# Altium PCB PDB REV 21.PcbDoc (part 2 of 2)
Units mil, origin at the board's own origin, x right, y up, seen from the top; angles counter-clockwise.
Board outline 3000 x 3000 mil, 4 copper layers (POWER/SIGNAL, SIG_GND, GND, Signal), stack 23.756 mil thick; 145 components, 115 nets, 452 pads, 119 vias.
Unrouted connection lines stored in the file: 70.
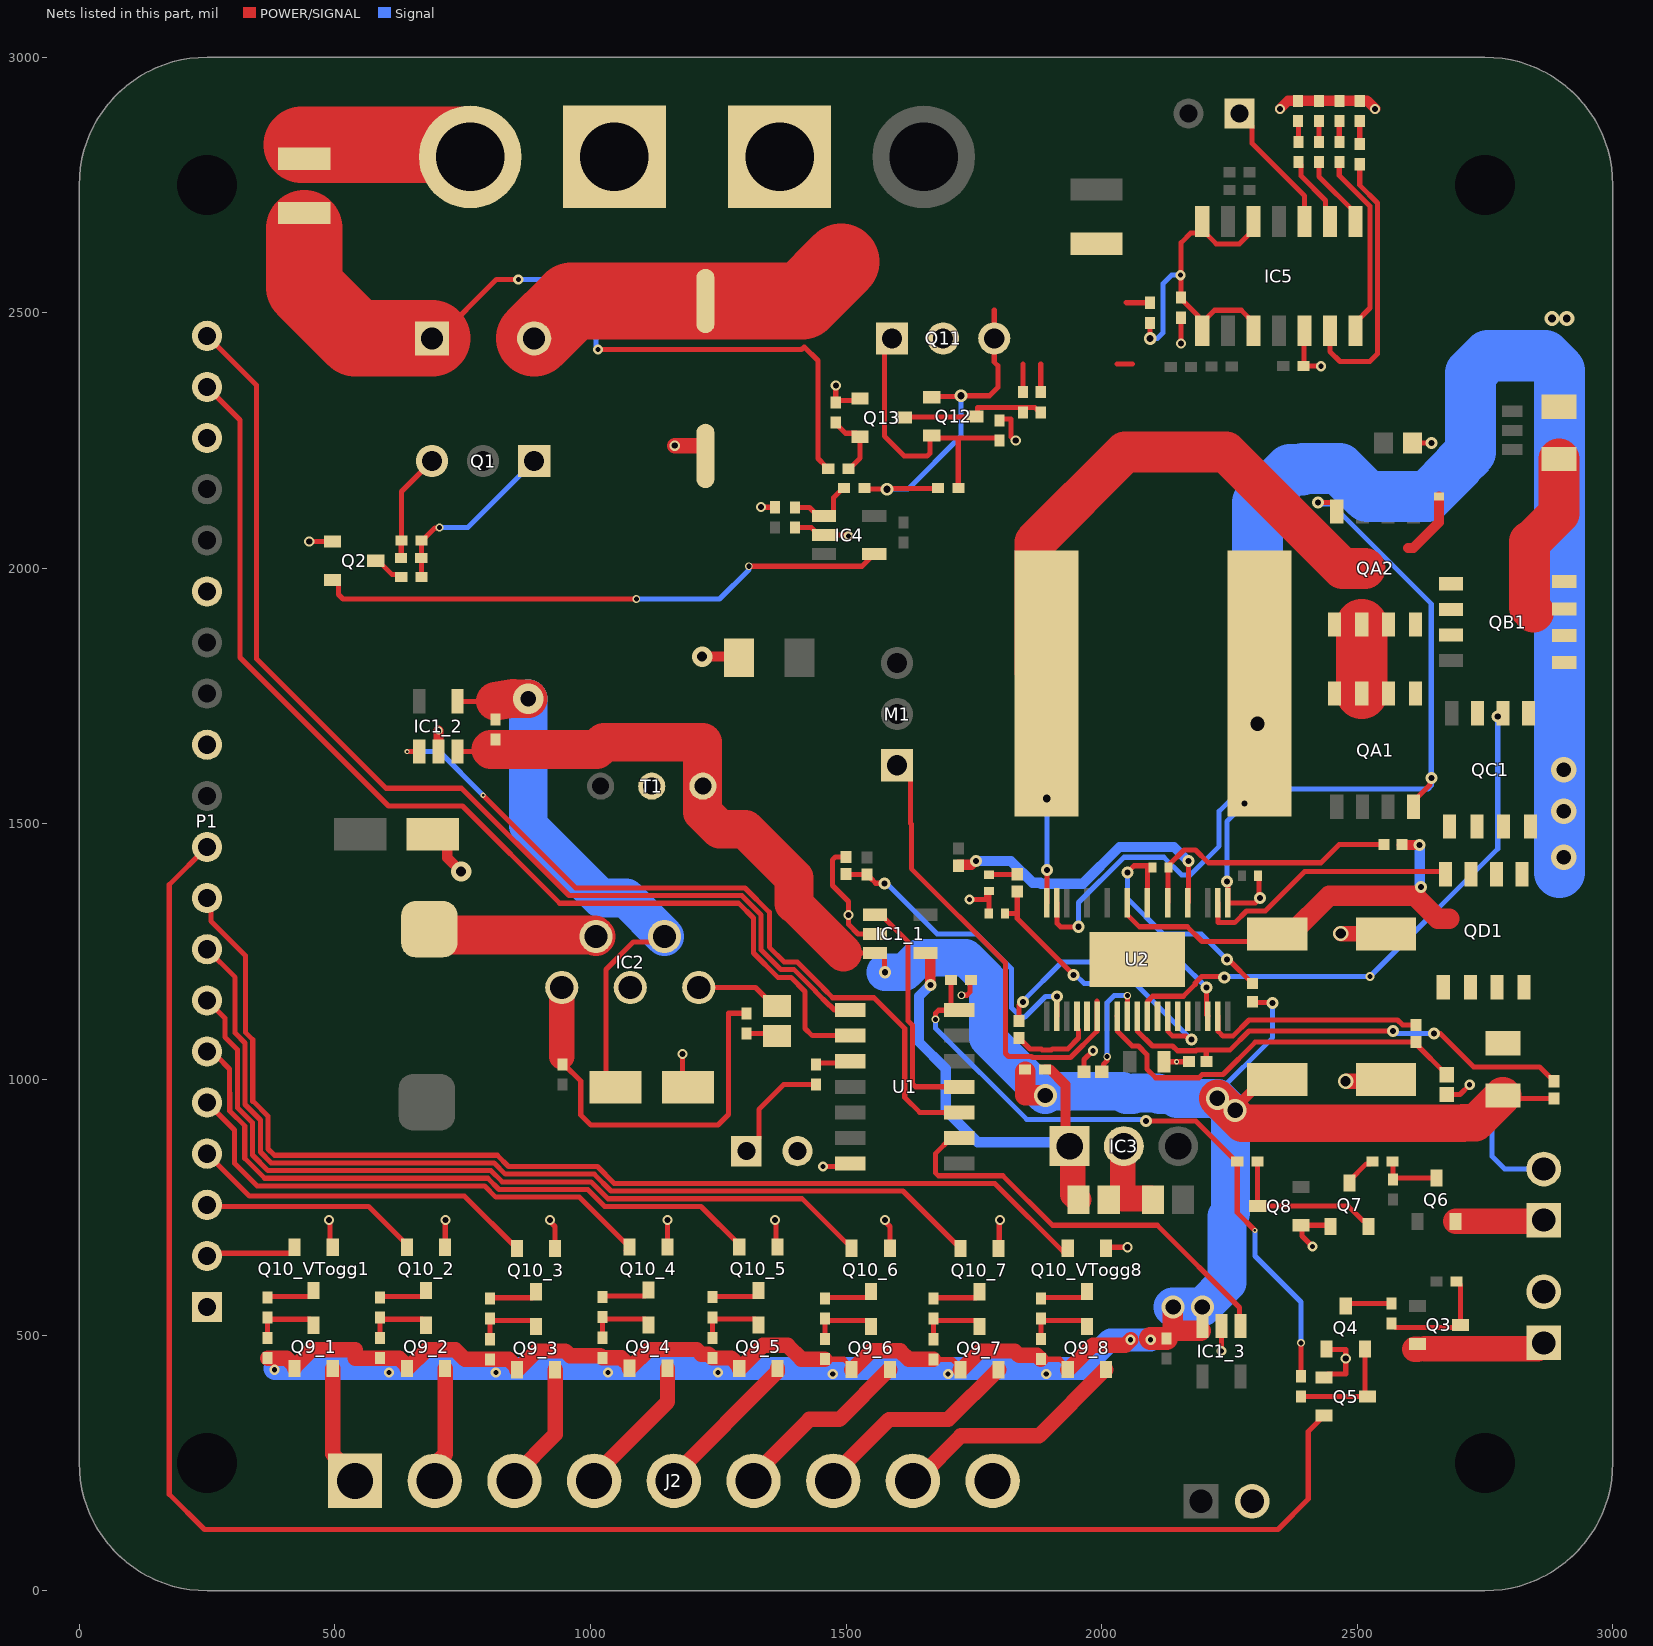
[diagram p4: the nets of this part, all layers, seen from the top]

## Via types
v1: diameter 23.62, hole 11.81, POWER/SIGNAL to Signal, 41 vias
v2: diameter 20, hole 10, POWER/SIGNAL to Signal, 22 vias
v3: diameter 19.68, hole 11.81, POWER/SIGNAL to Signal, 19 vias
v4: diameter 15, hole 10, POWER/SIGNAL to Signal, 9 vias
v5: diameter 10, hole 5, POWER/SIGNAL to Signal, 5 vias
v6: diameter 45, hole 30, POWER/SIGNAL to Signal, 5 vias
v7: diameter 50, hole 28, POWER/SIGNAL to Signal, 4 vias
v8: diameter 25, hole 14, POWER/SIGNAL to Signal, 3 vias
v9: diameter 30, hole 20, POWER/SIGNAL to Signal, 2 vias
v10: diameter 40, hole 20, POWER/SIGNAL to Signal, 2 vias
v11: diameter 30, hole 15, POWER/SIGNAL to Signal, 2 vias
v12: diameter 60, hole 40, POWER/SIGNAL to Signal, 2 vias
v13: diameter 18, hole 10, POWER/SIGNAL to Signal, 1 vias
v14: diameter 25, hole 15, POWER/SIGNAL to Signal, 1 vias
v15: diameter 60, hole 30, POWER/SIGNAL to Signal, 1 vias

## Nets (pads, with @x,y where several pads share a name; then routed paths per layer and width w, separated by ;. In a path a pad name is that pad's centre, name@x,y a point inside that pad or via, vN(x,y) a via of type N, cw(c..) or ccw(c..) an arc to the next point about the centre after c; other vN are vias at no path point) (continued)
GND: C1.2 C3.2 C4.1 C5.1 C6.2 C7.1 C8.1 C9.1 C10.2 C11.2 CDRV1.1 CFF1.1 CSS1.1 CV1.1 IC1_1.2 IC1_2.2 IC1_3.2 IC2.3 IC3.2 IC4.2 IC5.12 J1.2 J2.9 J3.2 J4.2 J5.1@1370,2805 J5.2@1405,860 J6.1 P1.1 P1.12 P1.15 P1.18 Q2.3 Q4.3 Q5.3 Q7.3 Q8.3 Q10_2.3 Q10_3.3 Q10_4.3 Q10_5.3 Q10_6.3 Q10_7.3 Q10_VTogg1.3 Q10_VTogg8.3 Q13.3 R11.2 R13.1 R18.1 R19.1 R21.2 R23.1 R25.2 R26.2 R29.2 R30.2 R32.1 R34.1 R39.1 RA1.1 RFQ1.1 T1.2 U1.14 U2.4 U2.5 U2.12 U2.14 U2.15 U2.39 | length 3097.5
  POWER/SIGNAL w10: v3(450,2052.4) Q2.3@495.35,2052.4 ; v3(488.54,725) 490.4,723.15 490.4,677.56 Q10_VTogg1.3@495.94,672.01 ; Q10_2.3@715.94,672.01 716.04,672.11 716.04,724.9 v3(716.14,725) ; v3(921.14,725) 921.14,722.38 930.94,712.58 Q10_3.3@930.94,669.65 ; Q10_4.3@1150.94,672.68 1151.04,672.78 1151.04,724.9 v3(1151.14,725) ; v3(1180,1050) 1180,995.87 C1.2@1190.87,985 ; v3(1334.09,2120) 1334.41,2119.68 R18.1@1361.14,2119.68 ; v3(1361.14,725) 1362.99,723.15 1362.99,675.27 Q10_5.3@1365.94,672.32 ; R19.1@1400,2079.72 1432.31,2079.72 1438.16,2073.87 1438.16,2072.13 1444.97,2065.31 IC4.2@1456.79,2065.31 1502.87,2065.31 v2(1504.68,2063.5) ; v2(1455,830) 1502.33,830 U1.14@1508.23,835.9 ; v3(1480,2357.75) R23.1@1480,2324.68 1483.86,2328.54 1523.82,2328.54 Q13.3@1527.68,2332.4 ; R11.2@1500,1435.73 1479.39,1435.73 1473.53,1429.87 1473.53,1379.62 1504.68,1348.47 v3(1504.68,1322.12) 1504.68,1303.84 1523.52,1285 IC1_1.2@1556.83,1285 ; v3(1576.14,725) 1576.14,722.38 1585.94,712.58 Q10_6.3@1585.94,670 ; v4(1726,1165) 1736.27,1165 1742.91,1171.65 1742.91,1195 R13.1@1744.88,1195 ; v2(1741.69,1352.52) 1775.16,1352.52 1775.16,1366.38 1778.03,1369.25 C10.2@1780,1369.25 1780,1325.75 C11.2@1779.25,1325 ; Q10_7.3@1798.54,669.65 1799.84,670.94 1799.84,723.7 v3(1801.14,725) ; 1810,2292.29 1822.6,2292.29 1822.6,2257.4 1829.64,2250.36 v3(1832.07,2250.36) ; RFQ1.1@1838.6,1081.45 1838.6,1080.47 1844.43,1074.64 1845.41,1074.64 1860.05,1060 1881.99,1060 1883.8,1058.19 1901.87,1058.19 1903.68,1060 1933.74,1060 1955,1081.26 1955,1097.39 1951.89,1100.5 U2.4@1951.89,1124 ; CSS1.1@1965.79,1015 1965.79,1039.06 v2(1983.11,1056.38) ; Q10_VTogg8.3@2008.54,670 2010.55,672.01 v3(2050.32,672.01) ; CDRV1.1@2122.03,1035 RA1.1@2171.38,1035 ; v3(2155.47,2440) R32.1@2155.47,2490.32 ; v2(2234.49,469.06) IC1_3.2@2234.49,517.64 ; IC5.12@2397,2465 2395.84,2463.84 2395.84,2397.5 R34.1@2394.68,2396.34 2428.26,2396.34 v2(2429.09,2395.51) ; v2(2412.43,673.61) 2391.99,694.05 2391.99,713.05 Q8.3@2390.04,715 2445.32,715 Q7.3@2447.64,712.68 ; Q5.3@2435.32,417.4 2442.13,424.21 2477.31,424.21 2477.64,424.54 v3(2477.64,454.21) 2477.64,471.78 2441.06,471.78 Q4.3@2440.24,472.6 ; v9(2477.31,996.73) v9@2480.02,996.73 ; C8.1@2608.54,2245 v1(2645,2245) ; CV1.1@2675,971.02 2701.02,971.02 v2(2720,990)
  POWER/SIGNAL w20: C6.2@691.73,1480 720,1451.73 720,1434.12 v10(747,1407.12) ; IC1_2.2@702.6,1641.57 702.6,1682.6 v4(703,1683) ; C3.2@1217.87,2240 1225,2232.87 C3.2@1225,2220 ; v10(1218.47,1827.61) 1288.34,1827.61 C9.1@1290.94,1825 ; v3(2349,2899) 2364.69,2914.69 R29.2@2384,2914.69 R25.2@2425,2914.69 R30.2@2505,2914.69 2519.45,2914.69 v3(2535.14,2899)
  POWER/SIGNAL w30: v3(1165,2240) C3.2@1217.87,2240 ; v9(2467.66,1285.91) 2468.58,1285 C7.1@2556.5,1285 ; v9@2480.02,996.73 2553.23,996.73 CFF1.1@2556.5,1000
  POWER/SIGNAL w50: IC3.2@2041.3,877.5 2041.3,767.4 C5.1@2097.13,767.4
  Signal w10: 2765,945 2763.54,943.54 2763.54,850 2788.54,825 J4.2@2865.04,825
  other v5: 2146.7,1035
  other v11: 2881,2489 2910.16,2489
GPOS: F2.1 J6.2 | length 339.7
  POWER/SIGNAL w150: 435,2828.5 741.5,2828.5 J6.2@765,2805
IN+_U_CurrentSensor1: CFF1.2 IC1_1.3 IC1_2.3 IC1_3.3 Q9_1.3 Q9_2.3 Q9_3.3 Q9_4.3 Q9_5.3 Q9_6.3 Q9_7.3 Q9_8.3 R9_1.2 R9_2.2 R9_3.2 R10_1.2 R10_2.2 R10_3.2 R10_4.2 R10_5.2 R10_6.2 R10_7.2 R10_8.2 RB1.2 RF1.2 RS1.2 T1.1 | length 7653
  POWER/SIGNAL w10: IC1_2.3@740,1641.57 801.6,1641.57 ; R10_6.2@1458.54,452.99 1495.75,452.99 1511.14,437.6 Q9_6.3@1511.14,432.68 ; 1495.16,1247.6 IC1_1.3@1556.83,1247.6 1568.64,1247.6 1575.45,1240.79 1575.45,1210 v1(1576.14,1210) ; R10_7.2@1671.14,452.64 1708.35,452.64 1723.74,437.24 Q9_7.3@1723.74,432.32 ; R10_8.2@1881.14,452.99 1918.35,452.99 1933.74,437.6 Q9_8.3@1933.74,432.68 ; R9_3.2@2126.5,493.58 2139.04,506.13 2147.32,514.41 2188.5,514.41 2191.18,511.73 IC1_3.3@2193.9,509.02 ; v6(2197,555) v6(2197,555) 2197.04,517.68 IC1_3.3@2197.09,517.64 IC1_3.3@2197.09,512.2 ; RF1.2@2295.63,1152.28 2296.77,1151.14 2333.54,1151.14 v1(2334.68,1150) ; RS1.2@2785,968.82 2790.55,963.27 RB1.2@2885,963.27
  POWER/SIGNAL w20: 801.6,1641.57 805.52,1645.5 ; v6(2261.39,940) 2261.39,944.89 2316.5,1000 CFF1.2@2343.5,1000
  POWER/SIGNAL w30: R10_1.2@368.54,455 405.75,455 421.14,439.61 Q9_1.3@421.14,438.23 ; Q9_1.3@421.14,434.69 Q9_1.3@421.14,438.23 ; R10_6.2@1458.54,452.99 1412.78,452.99 1385.77,480 1337.6,480 1292.6,435 Q9_5.3@1291.14,435 1291.14,439.92 1275.75,455.31 R10_5.2@1238.54,455.31 1230.98,462.87 1217.13,462.87 1207.91,472.09 1114.33,472.09 1077.6,435.35 Q9_4.3@1076.14,435.35 1076.14,440.28 1060.75,455.67 R10_4.2@1023.54,455.67 1019.21,460 960.1,460 951.04,469.06 894.33,469.06 857.6,432.32 Q9_3.3@856.14,432.32 856.14,437.24 840.75,452.64 R10_3.2@803.54,452.64 754.82,452.64 736.04,471.42 679.33,471.42 642.6,434.69 Q9_2.3@641.14,434.69 641.14,439.61 625.75,455 R10_2.2@588.54,455 540,455 540,471.42 454.33,471.42 Q9_1.3@421.14,438.23 ; Q9_6.3@1511.14,432.68 1512.6,432.68 1549.33,469.41 1606.04,469.41 1622.81,452.64 R10_7.2@1671.14,452.64 ; Q9_7.3@1723.74,432.32 1725.2,432.32 1761.93,469.06 1830.1,469.06 1838.6,460.55 1873.58,460.55 R10_8.2@1881.14,452.99 ; Q9_8.3@1933.74,432.68 1935.2,432.68 1983.11,480.59 2046.34,480.59 v2(2056.75,491) ; IC1_3.3@2193.9,509.02 IC1_3.3@2197.09,512.2
  POWER/SIGNAL w40: R9_1.2@1850.31,1015 1850.31,969.7 1889.04,969.7 v6(1890,968.74) ; v6(2140,555) 2139.04,554.04 2139.04,506.13 2139.04,505.54 2142.52,509.02 IC1_3.3@2193.9,509.02
  POWER/SIGNAL w45: v2@2096,493.58 R9_3.2@2126.5,493.58
  POWER/SIGNAL w73: 1398,1344.76 1495.16,1247.6 ; v6(2226.59,963.27) 2275.29,914.56 2706.36,914.56 2707.26,915.46 2731.64,915.46 RS1.2@2785,968.82
  POWER/SIGNAL w76: 805.52,1645.5 1012.13,1645.5 1026.63,1660 1219.15,1660 1219.15,1523.62 1252.95,1489.81 1302.7,1489.81 1398,1394.51 1398,1344.76
  Signal w10: v6(2226.59,963.27) 2226.59,963.51 2221.35,968.74 2334.68,1082.07 v1(2334.68,1150)
  Signal w45: v2@383,435 815,435 1473.98,435 1960.94,435 2016.94,491 v2(2056.75,491) v2(2096,491)
  Signal w73: v1(1576.14,1210) 1614.61,1210 1642.92,1238.31 1733.93,1238.31 1777.34,1194.89 1777.34,1143.73 1776.69,1143.08 1776.69,1082.05 v6(1890,968.74)
  Signal w76: v6@1888.46,978.74 1890.04,977.16 2041.24,977.16 2048.16,970.24 2060.64,970.24 2064.18,973.79 2109.59,973.79 2113.14,970.24 2140.27,970.24 2147.24,963.27 v6(2226.59,963.27) 2251.92,937.94 2251.92,739.04 2245.34,732.46 2245.34,603.35 v6(2197,555) v6(2140,555)
  other v2: 1473.98,424.21 1699.86,424.21 1891.66,424.21 606,427 815,427 1034.31,427 1249.36,427 381.93,432.32
IN-_U_CurrentSensor1: C4.2 IC1_1.4 IC3.1 R9_1.1 | length 909.4
  POWER/SIGNAL w20: IC1_1.4@1655.25,1247.6 1663.19,1247.6 1665,1245.79 v1(1665,1185) ; R9_1.1@1889.68,1020 1899.13,1020 1929.13,990 1929.13,878.27 IC3.1@1937.4,870
  POWER/SIGNAL w50: IC3.1@1935,877.5 1943.96,868.54 1943.96,775.25 1954.21,765 C4.2@1955,765
  Signal w20: v1(1665,1185) 1642.92,1162.92 1642.92,1073.54 1695.16,1021.3 1695.16,939.84 1757.5,877.5 IC3.1@1935,877.5
IN-_U_CurrentSensor2: C1.1 IC1_2.4 IC2.4 R9_2.1 | length 1244.9
  POWER/SIGNAL w10: IC1_2.4@740,1740 780.83,1740 814.17,1706.65 814.17,1730 ; 814.17,1740 814.17,1730 ; v15@872.6,1739.26 v15(878.34,1745) 834.7,1730 814.17,1730 ; C1.1@1049.13,985 1030.51,1003.62 1030.51,1215.51 1084.48,1269.48 1134.48,1269.48 IC2.4@1145,1280
  POWER/SIGNAL w76: 814.17,1740 849.43,1745.72 v15(878.34,1745)
  Signal w76: v15(878.34,1745) 878.34,1496.66 1019.52,1355.48 1069.52,1355.48 IC2.4@1145,1280
"Main Chute": P1.10 Q5.2 | length 3754.2
  POWER/SIGNAL w10: P1.10@250,1455 176.1,1381.1 176.1,188.9 245,120 2345,120 2404.37,179.37 2404.37,311.65 Q5.2@2435.32,342.6
NDRV: M1.1 U2.6 | length 914.6
  POWER/SIGNAL w10: M1.1@1600,1615 1626.5,1588.5 1626.5,1501.23 1627.85,1499.87 1627.85,1412.6 1811.81,1228.64 1811.81,1050.86 1817.67,1045 1862.74,1045 1864.55,1043.19 1939.41,1043.19 1990.76,1094.54 1990.76,1123.5 U2.6@1991.26,1124 1990.76,1124.5 1990.76,1153.46
NetC2_1: C2.1 R14.2 | length 62.2
  POWER/SIGNAL w10: R14.2@1305,1090.31 1359.69,1090.31 C2.1@1365,1085
NetC2_2: C2.2 IC2.5 | length 167.9
  POWER/SIGNAL w10: IC2.5@1212.01,1180 1323.15,1180 1359.09,1144.06 C2.2@1365,1144.06
NetC3_1: C3.1 D1.2 D4.3 Q1.3 Q11.2 R1.2 | length 878
  POWER/SIGNAL w10: R1.2@629.68,2020 630,2020.31 630,2054.68 D1.2@630.31,2055 630.31,2150.31 Q1.3@690,2210
  POWER/SIGNAL w150: D4.3@890,2450 963.15,2523.15 C3.1@1225,2523.15 1414.07,2523.15 1490.93,2600
NetC10_1: C10.1 R40.2 | length 55.4
  POWER/SIGNAL w10: C10.1@1780,1400.75 1780.49,1401.24 1834.51,1401.24 R40.2@1835,1401.73
NetC11_1: C11.1 R40.1 U2.13 | length 598.7
  POWER/SIGNAL w10: C11.1@1810.75,1325 1835,1325 ; R40.1@1835,1368.27 1835,1325 ; v1(1945,1205) 1835,1315 1835,1325 ; U2.13@2129.06,1124 2129.56,1123.5 2129.56,1094.54 2139.1,1085 2165.08,1085 2171.89,1078.19 v1(2175.58,1078.19)
  Signal w10: v1(1945,1205) 1948.69,1205 1965.43,1188.25 2065.52,1188.25 v1(2175.58,1078.19)
NetCF1_1: CF1.1 RF1.1 U2.28 | length 501.1
  POWER/SIGNAL w10: v1(2050.31,1405) 2063.58,1418.27 2099.25,1418.27 CF1.1@2099.25,1415 2089.68,1415 U2.28@2089.68,1346 ; v1(2245,1235) 2248.35,1235 RF1.1@2295.63,1187.72
  Signal w10: v1(2050.31,1405) 2050.31,1354.69 2120,1285 2195,1285 v1(2245,1235)
NetCF1_2: CF1.2 RF2.1 U2.26 | length 530.2
  POWER/SIGNAL w10: U2.26@2129.06,1346 2129.56,1346.5 2129.56,1411.66 CF1.2@2131.85,1413.96 ; CF1.2@2129.56,1417.91 2160.97,1449.33 2183.67,1449.33 2208.84,1424.16 2429.09,1424.16 2464.93,1460 RF2.1@2552.32,1460
NetCSS1_2: CSS1.2 U2.9 | length 225.7
  POWER/SIGNAL w10: CSS1.2@2000.43,1015 2001.22,1015 2003.43,1017.2 2003.43,1029.38 2010.76,1036.72 2010.76,1044.81 v4(2010.94,1045) ; U2.9@2050.32,1124 v4(2050.32,1164.19)
  Signal w10: v4(2010.94,1045) 2010.94,1150.82 2024.32,1164.19 v4(2050.32,1164.19)
NetD1_1: D1.1 Q1.1 R1.1 R2.2 | length 356.1
  POWER/SIGNAL w10: R2.2@669.37,1983.5 669.53,1983.66 669.53,2054.84 D1.1@669.68,2055 671.65,2055 695.7,2079.04 703.69,2079.04 v4(704.65,2080)
  Signal w10: v4(704.65,2080) 760,2080 Q1.1@890,2210
NetD2_1: D2.1 Q11.1 Q12.2 R21.1 | length 576.1
  POWER/SIGNAL w10: Q11.1@1590,2450 1575,2435 1575,2258.82 1613.82,2220 1625,2220 1625.47,2219.53 1658.55,2219.53 1664.41,2225.39 1664.41,2256.83 Q12.2@1667.68,2260.1 1672.57,2255.21 1720,2255.21 ; D2.1@1719.68,2157.2 1719.68,2254.89 1720,2255.21 ; R21.1@1800,2250.36 1795.16,2255.21 1720,2255.21
NetD3_1: D3.1 Q12.1 Q13.1 R20.1 | length 283.6
  POWER/SIGNAL w10: Q13.1@1612.32,2295 1613.57,2296.25 1751.07,2296.25 Q12.1@1752.32,2297.5 1757.24,2297.5 1757.24,2315 1869.25,2315 R20.1@1875.02,2309.23
NetD5_1: D5.1 IC5.1 | length 146.3
  POWER/SIGNAL w10: D5.1@2425,2795 2425,2766.78 2497,2694.78 IC5.1@2497,2678.54
NetD5_2: D5.2 R25.1 | length 40.9
  POWER/SIGNAL w10: D5.2@2425,2834.37 R25.1@2425,2875.32
NetD6_1: D6.1 IC5.14 | length 366.5
  POWER/SIGNAL w10: D6.1@2465,2795 2465,2768.48 2525,2708.48 2525,2509.24 2497,2481.24 IC5.14@2497,2465
NetD6_2: D6.2 R26.1 | length 40.6
  POWER/SIGNAL w10: D6.2@2465,2834.37 R26.1@2465,2875
NetD7_1: D7.1 IC5.2 | length 142.1
  POWER/SIGNAL w10: D7.1@2385,2795 2389.84,2790.16 2389.84,2768.19 2438.22,2719.81 2438.22,2687.32 IC5.2@2447,2678.54
NetD7_2: D7.2 R29.1 | length 40.3
  POWER/SIGNAL w10: D7.2@2385,2834.37 R29.1@2385,2874.69
NetD8_1: D8.1 IC5.13 | length 533.5
  POWER/SIGNAL w10: IC5.13@2447,2465 2447,2424 2466.36,2404.64 2524.64,2404.64 2540,2420 2540,2714.7 2505,2749.7 D8.1@2505,2790.63
NetD8_2: D8.2 R30.1 | length 45.3
  POWER/SIGNAL w10: D8.2@2505,2830 R30.1@2505,2875.32
NetIC1_U_CurrentSensor1_1: IC1_1.1 U1.4 | length 462.1
  POWER/SIGNAL w10: IC1_1.1@1556.83,1322.4 1568.64,1322.4 1583.02,1308.02 1583.38,1308.02 1621.63,1269.77 1621.63,1114.58 1630,1106.21 1630,992.01 1636.11,985.9 U1.4@1721.77,985.9
NetIC1_U_CurrentSensor2_1: IC1_2.1 U1.3 | length 1515.8
  POWER/SIGNAL w10: v5(641.57,1641.57) IC1_2.1@665.2,1641.57 ; v5(790,1556.22) 971.22,1375 1302.43,1375 1350,1327.43 1350,1259.02 1379.02,1230 1404.83,1230 1455,1179.83 1455,1178.98 1473.98,1160 1555,1160 1615,1100 1615,965 1644.1,935.9 U1.3@1721.77,935.9
  Signal w10: v5(641.57,1641.57) 704.65,1641.57 v5(790,1556.22)
NetIC1_U_CurrentSensor3_1: IC1_3.1 U1.2 | length 838.8
  POWER/SIGNAL w10: U1.2@1721.77,885.9 1705.53,885.9 1674.76,855.13 1674.76,817.76 1680.62,811.9 1806.84,811.9 1903.74,715 2109.04,715 2270,554.04 2270,519.53 IC1_3.1@2271.89,517.64
NetIC2_1: IC2.1 R14.1 R15.1 | length 789.4
  POWER/SIGNAL w10: R15.1@945,1029.68 948.5,1029.68 981.11,997.07 981.11,930.86 1000.86,911.11 1249.36,911.11 1270,931.76 1270,1129.68 R14.1@1305,1129.68
  POWER/SIGNAL w50: 943.98,1045 IC2.1@943.98,1180
NetIC2_2: IC2.2 L1.2 | length 331.9
  POWER/SIGNAL w76: L1.2@685,1294.29 696.43,1282.86 1008.12,1282.86 IC2.2@1010.98,1280
NetIC4_1: IC4.1 R16.1 R19.2 | length 142.5
  POWER/SIGNAL w10: R19.2@1400,2119.09 1428.6,2119.09 1444.97,2102.72 IC4.1@1456.79,2102.72 1468.6,2102.72 1475.41,2109.53 1475.41,2138.17 1494.44,2157.2 R16.1@1496.41,2157.2
NetIC4_4: IC4.4 Q2.2 | length 1128.6
  POWER/SIGNAL w10: Q2.2@495.35,1977.6 500.28,1977.6 507.09,1970.79 507.09,1948.77 515.86,1940 v4(1090,1940) ; v4(1310,2004.13) 1531.42,2004.13 IC4.4@1555.21,2027.91
  Signal w10: v4(1090,1940) 1252.5,1940 1310,1997.5 v4(1310,2004.13)
NetIC5_3: IC5.3 P2.1 | length 264.1
  POWER/SIGNAL w10: P2.1@2270,2890 2294.53,2865.47 2294.53,2831.36 2397,2728.89 IC5.3@2397,2678.54
NetJ3_1: J3.1 Q3.2 | length 242.8
  POWER/SIGNAL w50: Q3.2@2612.72,472.6 Q3.2@2618.31,472.6 ; Q3.2@2632.72,473.19 2853.23,473.19 J3.1@2865.04,485
NetJ4_1: J4.1 Q6.2 | length 173.6
  POWER/SIGNAL w50: Q6.2@2692.44,722.68 2862.72,722.68 J4.1@2865.04,725
NetJ5_1: J5.1@1305,860 R12.2@1441.5,990.31 | length 223.9
  POWER/SIGNAL w10: J5.1@1305,860 1329.53,884.53 1329.53,941.56 1378.29,990.31 R12.2@1441.5,990.31
NetP1_19: P1.19 U1.9 | length 2138.8
  POWER/SIGNAL w10: P1.19@250,2355 314.53,2290.47 314.53,1825.47 605,1535 750,1535 940,1345 1290,1345 1319.09,1315.91 1319.09,1247.5 1366.6,1200 1392.4,1200 1420,1172.4 1420,1100 1434.1,1085.9 U1.9@1508.23,1085.9
NetP1_20: P1.20 U1.8 | length 2184
  POWER/SIGNAL w10: P1.20@250,2455 346.64,2358.36 346.64,1823.36 600,1570 747.94,1570 957.94,1360 1296.21,1360 1334.09,1322.12 1334.09,1253.71 1372.81,1215 1398.61,1215 1440,1173.61 1440,1172.76 1467.76,1145 1468.61,1145 1477.72,1135.9 U1.8@1508.23,1135.9 1521.22,1135.9 U1.8@1530,1144.68
NetQ2_1: Q2.1 R2.1 | length 63
  POWER/SIGNAL w10: Q2.1@580,2015 584.92,2015 611.57,1988.35 625.16,1988.35 R2.1@630,1983.5
NetQ3_1: Q3.1 R3.1 R4.2 | length 218.8
  POWER/SIGNAL w10: R4.2@2575.04,515 2697.36,515 Q3.1@2702.36,520 2702.36,597.05 2701.22,598.19 2701.22,600.16 2696.38,605 R3.1@2694.41,605
NetQ4_1: Q4.1 R4.1 | length 91.8
  POWER/SIGNAL w10: Q4.1@2477.64,557.24 2482.26,561.87 R4.1@2567.54,561.87
NetQ4_2: Q4.2 Q5.1 R5.1 | length 217.5
  POWER/SIGNAL w10: R5.1@2390.2,380.16 2519.8,380.16 Q5.1@2519.96,380 ; Q5.1@2515.04,384.92 Q4.2@2515.04,472.6
NetQ6_1: Q6.1 R6.1 R7.2 | length 121.6
  POWER/SIGNAL w10: R7.2@2569.41,840 2569.72,839.69 2569.72,805 R6.1@2570.04,804.68 ; R6.1@2570.04,809.69 2572.4,807.32 Q6.1@2655.04,807.32
NetQ7_1: Q7.1 R7.1 | length 65.6
  POWER/SIGNAL w10: Q7.1@2485.04,797.32 2485.04,802.24 2517.95,835.16 2525.2,835.16 R7.1@2530.04,840
NetQ7_2: Q7.2 Q8.1 R8.1 | length 324.3
  POWER/SIGNAL w10: R8.1@2304.68,840 2304.68,753.11 Q8.1@2305.39,752.4 2482.72,752.4 2510.71,724.41 2515.63,724.41 2522.44,717.6 Q7.2@2522.44,712.68
NetQ9_VTogg1_1: Q9_1.1 R10_1.1 R11_1.2 | length 134.4
  POWER/SIGNAL w10: R10_1.1@368.54,494.37 R11_1.2@368.54,534.69 ; R11_1.2@372.17,531.06 451.73,531.06 458.54,524.25 Q9_1.1@458.54,519.33
NetQ9_VTogg2_1: Q9_2.1 R10_2.1 R11_2.2 | length 134.4
  POWER/SIGNAL w10: R10_2.1@588.54,494.37 R11_2.2@588.54,534.69 ; R11_2.2@592.17,531.06 671.73,531.06 678.54,524.25 Q9_2.1@678.54,519.33
NetQ9_VTogg3_1: Q9_3.1 R10_3.1 R11_3.2 | length 134.4
  POWER/SIGNAL w10: R10_3.1@803.54,492.01 R11_3.2@803.54,532.32 ; R11_3.2@807.17,528.7 886.73,528.7 893.54,521.89 Q9_3.1@893.54,516.97
NetQ9_VTogg4_1: Q9_4.1 R10_4.1 R11_4.2 | length 134.4
  POWER/SIGNAL w10: R10_4.1@1023.54,495.04 R11_4.2@1023.54,535.35 ; R11_4.2@1027.17,531.73 1106.73,531.73 1113.54,524.92 Q9_4.1@1113.54,520
NetQ9_VTogg5_1: Q9_5.1 R10_5.1 R11_5.2 | length 134.4
  POWER/SIGNAL w10: R10_5.1@1238.54,494.68 R11_5.2@1238.54,535 ; R11_5.2@1242.17,531.38 1321.73,531.38 1328.54,524.57 Q9_5.1@1328.54,519.65
NetQ9_VTogg6_1: Q9_6.1 R10_6.1 R11_6.2 | length 134.4
  POWER/SIGNAL w10: R10_6.1@1458.54,492.36 R11_6.2@1458.54,532.68 ; R11_6.2@1462.17,529.06 1541.73,529.06 1548.54,522.24 Q9_6.1@1548.54,517.32
NetQ9_VTogg7_1: Q9_7.1 R10_7.1 R11_7.2 | length 134.4
  POWER/SIGNAL w10: R10_7.1@1671.14,492.01 R11_7.2@1671.14,532.32 ; R11_7.2@1674.76,528.7 1754.33,528.7 1761.14,521.89 Q9_7.1@1761.14,516.97
NetQ9_VTogg8_1: Q9_8.1 R10_8.1 R11_8.2 | length 134.4
  POWER/SIGNAL w10: R10_8.1@1881.14,492.36 R11_8.2@1881.14,532.68 ; R11_8.2@1884.76,529.06 1964.33,529.06 1971.14,522.24 Q9_8.1@1971.14,517.32
NetQ10_VTogg1_1: Q10_VTogg1.1 R11_1.1 | length 98.4
  POWER/SIGNAL w10: R11_1.1@368.54,574.06 370.12,575.63 451.73,575.63 458.54,582.44 Q10_VTogg1.1@458.54,587.36
NetQ10_VTogg2_1: Q10_2.1 R11_2.1 | length 98.4
  POWER/SIGNAL w10: R11_2.1@588.54,574.06 590.12,575.63 671.73,575.63 678.54,582.44 Q10_2.1@678.54,587.36
NetQ10_VTogg3_1: Q10_3.1 R11_3.1 | length 98.4
  POWER/SIGNAL w10: R11_3.1@803.54,571.69 805.12,573.27 886.73,573.27 893.54,580.08 Q10_3.1@893.54,585
NetQ10_VTogg4_1: Q10_4.1 R11_4.1 | length 98.4
  POWER/SIGNAL w10: R11_4.1@1023.54,574.72 1025.12,576.3 1106.73,576.3 1113.54,583.11 Q10_4.1@1113.54,588.03
NetQ10_VTogg5_1: Q10_5.1 R11_5.1 | length 98.4
  POWER/SIGNAL w10: R11_5.1@1238.54,574.37 1240.12,575.94 1321.73,575.94 1328.54,582.76 Q10_5.1@1328.54,587.68
NetQ10_VTogg6_1: Q10_6.1 R11_6.1 | length 98.4
  POWER/SIGNAL w10: R11_6.1@1458.54,572.05 1460.12,573.62 1541.73,573.62 1548.54,580.43 Q10_6.1@1548.54,585.35
NetQ10_VTogg7_1: Q10_7.1 R11_7.1 | length 98.4
  POWER/SIGNAL w10: R11_7.1@1671.14,571.69 1672.72,573.27 1754.33,573.27 1761.14,580.08 Q10_7.1@1761.14,585
NetQ10_VTogg8_1: Q10_VTogg8.1 R11_8.1 | length 98.4
  POWER/SIGNAL w10: R11_8.1@1881.14,572.05 1882.72,573.62 1964.33,573.62 1971.14,580.43 Q10_VTogg8.1@1971.14,585.35
NetQ13_2: Q13.2 R22.1 R23.2 | length 133.6
  POWER/SIGNAL w10: R23.2@1480,2285.31 1480,2283.35 1498.94,2264.41 1520.87,2264.41 Q13.2@1527.68,2257.6 1527.68,2216.02 1506.65,2195 R22.1@1504.68,2195
NetR11_1: R11.1 R12.2@1541,1401.27 U2.2 | length 628.9
  POWER/SIGNAL w10: R11.1@1500,1402.27 1501,1401.27 R12.2@1541,1401.27 1541,1400.28 1546.83,1394.46 1547.81,1394.46 1558.08,1384.19 1574,1384.19 v1(1575,1383.19) ; U2.2@1912.52,1124 v1(1912.52,1162.59)
  Signal w10: v1(1575,1383.19) 1580.19,1383.19 1678.57,1284.81 1755.95,1284.81 1823.84,1216.92 1823.84,1140.56 1841.88,1122.52 1850.16,1122.52 1890.22,1162.59 v1(1912.52,1162.59)
NetR12_1: R12.1@1441.5,1029.68 U1.10 | length 69.3
  POWER/SIGNAL w10: R12.1@1441.5,1029.68 1444.61,1032.79 1505.12,1032.79 U1.10@1508.23,1035.9
NetR38_2: R38.2 U2.24 | length 596.4
  POWER/SIGNAL w10: U2.24@2168.43,1346 2170,1347.57 v1(2170,1427.51)
  POWER/SIGNAL w20: R38.2@1719.68,1418.27 1719.68,1419.25 1720.51,1420.08 1745.49,1420.08 1752.93,1427.51 v1(1753.91,1427.51)
  Signal w20: v1(1753.91,1427.51) 1822.49,1427.51 1865,1385 1879.92,1385 1881.73,1383.19 1963.19,1383.19 2035,1455 2141.53,1455 2169.02,1427.51 v1(2170,1427.51)
NetR41_2: R41.2 U2.18 | length 438
  POWER/SIGNAL w10: U2.18@2227.48,1124 2227.98,1123.5 2227.98,1094.54 2237.52,1085 2256.81,1085 2288.62,1116.81 2579.03,1116.81 2589.11,1106.73 R41.2@2615,1106.73
NetRFQ1_2: RFQ1.2 U2.17 | length 510.8
  POWER/SIGNAL w10: RFQ1.2@1838.6,1114.91 1838.6,1145.89 1844.72,1152 v1(1846,1152) ; v1(2205,1180) 2205,1126.8 U2.17@2207.8,1124
  Signal w10: v1(1846,1152) 1846,1153.28 1922.72,1230 2155,1230 v1(2205,1180)
PGOOD: CV1.2 R41.1 U2.8 | length 785.2
  POWER/SIGNAL w10: U2.8@2030.63,1124 2031.13,1123.5 2031.13,1094.54 2060,1065.67 2072.04,1065.67 2088.57,1049.14 2088.57,1020.86 2105.88,1003.54 2190.64,1003.54 2196.86,1009.77 2237.26,1009.77 2300.68,1073.19 2614.92,1073.19 R41.1@2615,1073.27 2615,1069.61 CV1.2@2675,1009.61
S1: P1.2 Q10_VTogg1.2 | length 180.9
  POWER/SIGNAL w10: P1.2@250,655 255.28,660.28 414.33,660.28 421.14,667.09 Q10_VTogg1.2@421.14,671.81
S2: P1.3 Q10_2.2 | length 438.2
  POWER/SIGNAL w10: P1.3@250,755 253.1,751.9 566.17,751.9 641.14,676.93 Q10_2.2@641.14,672.01 641.14,671.81 Q10_2.2@634.33,665
S3: P1.4 Q10_3.2 | length 692.8
  POWER/SIGNAL w10: P1.4@250,855 333.1,771.9 753.69,771.9 Q10_3.2@856.14,669.45 ; Q10_3.2@849.33,662.64 Q10_3.2@856.14,669.45 ; Q10_3.2@856.14,669.65 Q10_3.2@856.14,669.45
S4: P1.5 Q10_4.2 | length 985
  POWER/SIGNAL w10: P1.5@264.65,955 264.65,940.35 303.74,901.26 303.74,836.26 348.1,791.9 793.1,791.9 815,770 978.62,770 Q10_4.2@1076.14,672.48 ; Q10_4.2@1069.33,665.67 Q10_4.2@1076.14,672.48 ; Q10_4.2@1076.14,672.68 Q10_4.2@1076.14,672.48
S5: P1.6 Q10_5.2 | length 1287.9
  POWER/SIGNAL w10: P1.6@250,1055 259.39,1045.61 269.39,1045.61 294.07,1020.93 294.07,973.9 294.53,973.44 294.53,938.76 323.74,909.54 323.74,845.9 362.74,806.9 799.31,806.9 821.21,785 995,785 1028.1,751.9 1216.48,751.9 1291.14,677.24 Q10_5.2@1291.14,672.32 Q10_5.2@1291.14,672.13
S6: P1.7 Q10_6.2 | length 1587.2
  POWER/SIGNAL w10: P1.7@250,1155 285,1120 285,1082.97 309.53,1058.44 309.53,944.97 338.74,915.76 338.74,852.52 369.36,821.9 805.52,821.9 827.43,800 1001.21,800 1034.31,766.9 1414.24,766.9 Q10_6.2@1511.14,670
S7: P1.8 Q10_7.2 | length 1887.7
  POWER/SIGNAL w10: P1.8@250,1255 305,1200 305,1091.26 324.53,1071.73 324.53,951.18 354.53,921.18 354.53,858.1 375.72,836.9 811.74,836.9 833.64,815 1007.43,815 1040.52,781.9 1611.29,781.9 1723.74,669.45 Q10_7.2@1723.74,669.65
S8: P1.9 Q10_VTogg8.2 | length 2190.8
  POWER/SIGNAL w10: P1.9@250,1355 257.5,1347.5 257.5,1310.47 325,1242.97 325,1092.47 339.53,1077.94 339.53,957.4 340.32,957.4 369.53,928.19 369.53,864.31 381.93,851.9 817.95,851.9 839.85,830 1013.64,830 1046.74,796.9 1791.22,796.9 Q10_VTogg8.2@1926.03,662.09 ; Q10_VTogg8.2@1926.93,662.99 1933.74,669.8 Q10_VTogg8.2@1933.74,670
SENSE: QB1.5 QB1.6 QB1.7 QB1.8 QC1.1 QC1.2 QC1.3 R39.2 U2.11 | length 1435.5
  POWER/SIGNAL w10: U2.11@2089.68,1124 2089.68,1152.96 2099.73,1163 2119.01,1163 2119.21,1162.8 2119.41,1163 2138.7,1163 2138.9,1162.8 2139.1,1163 2159.64,1163 2183.19,1186.55 2183.19,1189.03 2195.97,1201.81 2238.19,1201.81 v1(2240,1200) ; 2836.8,2052.4 2836.8,2060
  POWER/SIGNAL w80: 2845,1915 2836.8,1923.2 2836.8,2052.4 2840.02,2052.4 2895,2107.38 R39.2@2895,2213.82
  Signal w10: v1(2240,1200) 2241.81,1201.81 v13(2525.2,1201.81) 2775,1451.61 v1(2775,1710)
SW1: CA1.1 L2.2 QA1.5 QA1.6 QA1.7 QA1.8 QA2.5 QA2.6 QA2.7 QA2.8 QB1.1 QB1.2 QB1.3 U2.38 | length 1758.8
  POWER/SIGNAL w10: U2.38@1892.83,1346 v1(1892.83,1410) ; 2485,1730 2485,1919.96 2485.04,1920
  POWER/SIGNAL w20: 2600,2040 2610,2040 2660,2090 CA1.1@2660,2140.35
  POWER/SIGNAL w80: L2.2@1891.81,1775 1869.21,1797.6 1869.21,2051.21 2045.62,2227.62 2243.54,2227.62 2471.16,2000 2515,2000
  POWER/SIGNAL w100: QA1.7@2509,1755 QA2.6@2509,1890
  Signal w10: v1(1892.83,1410) v14(1892.83,1550)
SW2: CB1.2 L2.1 QC1.5 QC1.6 QC1.7 QC1.8 QD1.1 QD1.2 QD1.3 U2.20 | length 2602.6
  POWER/SIGNAL w10: v1(2245,1387.35) 2247.17,1385.18 U2.20@2247.17,1346 2247.17,1345.5 2300.5,1345.5 v1(2310,1355) 2307.87,1357.13 2307.87,1396.59 CB1.2@2305.75,1398.72 ; QC1.5@2676.65,1491 QC1.5@2681,1495.35
  Signal w10: v1(2245,1387.35) 2245,1505 v1(2280,1540)
  Signal w100: v7(2305,1696) 2305,2129 2369,2193 2391.51,2193 2394.33,2195.81 2450.67,2195.81 2451.49,2195 2465.54,2195 2519.83,2140.71 2637.42,2140.71 2696,2199.29 2696,2201.51 2722,2227.51 2722,2382 2756,2416 2867,2416 2896,2387 2896,1405
  other v7: 2904,1435 2904,1525 2904,1605.85
TG1: QA1.4 QA2.4 U2.37 | length 1767.4
  POWER/SIGNAL w10: U2.37@1912.52,1346 1913.02,1345.5 1913.02,1305.67 1920,1298.69 1954.69,1298.69 v1(1955,1299) ; v1(2423,2129) 2452.2,2129 2460,2121.2 QA2.4@2460,2111.22 ; QA1.4@2610,1533.78 2610,1544.61 2642.39,1577 2642.39,1587.39 v1(2645,1590)
  Signal w10: v1(1955,1299) 1955,1346.3 2043.7,1435 2121.72,1435 2156.72,1400 2173.33,1400 2230,1456.67 2230,1525 2273.7,1568.7 2638.7,1568.7 2645,1575 v1(2645,1590) 2645,1930.69 2449.3,2126.39 2425.61,2126.39 v1(2423,2129)
TG2: QD1.4 U2.21 | length 527.1
  POWER/SIGNAL w10: U2.21@2227.48,1346 2227.98,1345.5 2227.98,1307.02 2237.5,1307.02 2256.81,1307 ; 2256.83,1307.02 2260.38,1307.02 2283.36,1330 2320.12,1330 2396.93,1406.81 2667.32,1406.81 QD1.4@2672.4,1401.73
V1: J2.1 Q9_1.2 | length 227.3
  POWER/SIGNAL w30: Q9_1.2@495.94,434.69 495.94,267.6 J2.1@538.54,225
V2: J2.2 Q9_2.2 | length 218.6
  POWER/SIGNAL w30: J2.2@694.45,225 694.45,245.65 715.94,267.14 Q9_2.2@715.94,434.69
V3: J2.3 Q9_3.2 | length 240.7
  POWER/SIGNAL w30: J2.3@850.35,225 930.94,305.59 Q9_3.2@930.94,432.32
V4: J2.4 Q9_4.2 | length 270.3
  POWER/SIGNAL w30: J2.4@1006.26,225 1150.94,369.68 Q9_4.2@1150.94,435.35
V5: J2.5 Q9_5.2 | length 294.4
  POWER/SIGNAL w30: J2.5@1162.17,225 1365.94,428.78 Q9_5.2@1365.94,435
V6: J2.6 Q9_6.2 | length 353.9
  POWER/SIGNAL w30: J2.6@1318.07,225 1428.34,335.27 1487.08,335.27 1584.49,432.68 Q9_6.2@1585.94,432.68
V7: J2.7 Q9_7.2 | length 410.4
  POWER/SIGNAL w30: J2.7@1473.98,225 1584.07,335.09 1699.86,335.09 1797.09,432.32 Q9_7.2@1798.54,432.32
V8: J2.8 Q9_8.2 | length 464.7
  POWER/SIGNAL w30: J2.8@1629.88,225 1646.33,225 1724.48,303.15 1877.56,303.15 2007.09,432.68 Q9_8.2@2008.54,432.68
VAT: R5.2 R8.2 R13.2 U1.7 | length 1290.1
  POWER/SIGNAL w10: v4(1675.11,1117.87) 1675.11,1129.7 1680.96,1135.56 1705.17,1135.56 1705.51,1135.9 R13.2@1705.51,1195 ; v1(2086.89,918.98) 2184.37,918.98 2263.35,840 R8.2@2265.31,840 2265.31,739.69 v5(2300,705) ; R5.2@2390.04,419.69 v4(2390,485)
  Signal w10: v4(1675.11,1117.87) 1675.11,1100.52 1853.38,922.24 v1@2086.89,922.24 ; v5@2299.92,705.08 v5(2300,705) 2300,655 2390,565 v4(2390,485)
VBAS: D4.1 F2.2 R22.2 | length 1542
  POWER/SIGNAL w10: D4.1@690,2450 701,2450 816,2565 v2(859,2565) ; v2(1015,2428) 1413,2428 1418.34,2433.34 1445,2406.67 1445,2215 R22.2@1460.16,2199.84 ; R22.2@1458.5,2199.84 1463.35,2195 R22.2@1465.31,2195
  POWER/SIGNAL w150: 440,2665 440,2550 540,2450 D4.1@690,2450
  Signal w10: v2(859,2565) 946,2565 1010.98,2500.02 1010.98,2435 ccw(c1015,2439.01) 1015,2433.34 v2(1015,2428)
VBAT: D2.2 D3.2 F1.2 Q11.3 Q12.3 R16.2 R20.2 R28.2 | length 883.1
  POWER/SIGNAL w10: R16.2@1535.78,2157.2 1537.18,2158.6 1540.78,2155 v8(1580,2155) 1581.1,2156.1 1679.21,2156.1 D2.2@1680.31,2157.2 ; Q12.3@1667.68,2334.9 1669.11,2336.33 1723.57,2336.33 v8(1725,2337.76) 1780.68,2337.76 1797,2354.09 1797,2396.5 1790,2403.5 Q11.3@1790,2450 ; Q11.3@1782.68,2442.68 Q11.3@1790,2450 ; 1790,2505 Q11.3@1790,2450 ; D3.2@1846,2354.59 1846,2399.69 ; R20.2@1881,2354.59 1881,2399.69 ; 2030,2399.69 2060,2399.69 ; 2048.15,2520 2048.46,2519.69 R28.2@2095,2519.69
  Signal w10: v8(1580,2155) 1621.22,2155 1725,2258.78 v8(1725,2337.76)
VFB: RA1.2 RB1.1 U2.10 | length 939.9
  POWER/SIGNAL w10: U2.10@2070,1124 2070.5,1123.5 2070.5,1094.54 2099.37,1065.67 2138.97,1065.67 2148.26,1056.38 2184.61,1056.38 2185.78,1057.54 2205,1057.54 ; RA1.2@2204.84,1035 2204.84,1057.39 2205,1057.54 ; v1(2570,1095) 2288.28,1095 2250.82,1057.54 2205,1057.54 ; v1(2650,1090) 2662.44,1090 2727.44,1025 2856.73,1025 2878.19,1003.54 2879.17,1003.54 2885,997.72 RB1.1@2885,996.73
  Signal w10: v1(2570,1095) 2575,1090 v1(2650,1090)
VOUTSNS: C7.2 QD1.5 QD1.6 QD1.7 QD1.8 RF2.2 RS1.1 U2.30 | length 884.2
  POWER/SIGNAL w10: U2.30@2050.31,1346 2050.31,1322.5 2073.81,1299 2167.64,1299 2196.64,1270 2328.5,1270 C7.2@2343.5,1285
  POWER/SIGNAL w20: RF2.2@2587.76,1460 2586.52,1458.77 v1(2622.32,1458.77) ; 2612.72,1360 2625,1372.28 v1(2625,1376.57)
  POWER/SIGNAL w40: C7.2@2343.5,1285 2370.5,1285 2445.5,1360 2612.72,1360 2657.72,1315 2680,1315 ; RS1.1@2774.17,1071.18 RS1.1@2785,1071.18
  Signal w20: v1(2622.32,1458.77) 2622.32,1380.24 2625,1377.55 v1(2625,1376.57)
VREF: IC5.5 IC5.7 IC5.8 IC5.10 R28.1 R32.2 | length 730.4
  POWER/SIGNAL w10: v8(2095,2450) R28.1@2095,2480.32 ; IC5.8@2197,2465 IC5.8@2197,2481.24 ; IC5.7@2197,2678.54 IC5.7@2197,2664.82 ; IC5.10@2297,2465 2297,2481.24 2273.22,2505.02 2220.78,2505.02 IC5.8@2197,2481.24 ; IC5.5@2297,2678.54 2297,2662.3 2269.69,2635 2224.3,2635 2197,2662.3 IC5.7@2197,2664.82 ; IC5.8@2197,2481.24 2188.22,2490.02 2188.22,2494.97 2155.47,2527.72 R32.2@2155.47,2529.69 2155.63,2529.84 2155.63,2637.18 2174.49,2656.04 2188.22,2656.04 IC5.7@2197,2664.82
  Signal w10: v8(2095,2450) 2109,2450 2120,2461 2120,2557 2136.69,2573.69 v2(2154.31,2573.69)
pads on no net: P1.16 P1.17 R35.2 R35.5 U1.5 U1.6 U1.11 U1.12 U1.13 U2.3 U2.16

## Polygon pours and split planes (outlines as drawn)
no net on POWER/SIGNAL "POWER/SIGNAL-No Net" (solid, pour order 56): 362.74,440.28
no net on POWER/SIGNAL "`" (solid, pour order 46): 2495.04,2085
DRVCC on POWER/SIGNAL "`" (solid, pour order 40): 2622.32,2373.15 2550.53,2373.15 2535.14,2357.75 2469.96,2357.75 2469.96,2288.15 2585.52,2288.15 2622.32,2324.95
IN+_U_CurrentSensor1 on POWER/SIGNAL "`" (solid, pour order 44): 1595,1265 1595,1187.72 1473.98,1187.72 1473.98,1265
no net on POWER/SIGNAL "`" (solid, pour order 42): 2730,2288.15
FET_A on POWER/SIGNAL "`" (solid, pour order 13): 747.94,2095 747.94,2080 ccw(c803.97,2076.03) 800,2020 1125,2015 cw(c1136.59,1988.41) 1163.19,2000 1268.93,1995 1268.93,2045 ccw(c1201.22,2055.71) 1225,2120
no net on POWER/SIGNAL "`" (solid, pour order 17): 1305,1740
no net on POWER/SIGNAL "`" (solid, pour order 7): 745,2150
no net on POWER/SIGNAL "`" (solid, pour order 5): 745,2250
NetC3_1 on POWER/SIGNAL "`" (solid, pour order 3): 825,2500 955,2500 955,2405 830,2280 775,2280 745,2250 745,2150 615,2150 615,2290
GND on SIG_GND "`" (solid, pour order 54): 50,250 50,2750 cw(c247,2755) 242,2952 2750,2950 cw(c2750,2750) 2950,2750 2950,275 cw(c2737.5,262.5) 2750,50 250,50 cw(c250,250)
no net on SIG_GND "`" (solid, pour order 51): 1400,3004
no net on SIG_GND "`" (solid, pour order 49): 2999,2751

## Other copper
POWER/SIGNAL:
  rectangle net IN+_U_CurrentSensor1: 2043.7,471.78 2126.5,516.97
  rectangle net IN+_U_CurrentSensor1: 1877.6,412.99 1946.12,460.87
  rectangle net IN+_U_CurrentSensor1: 1664.78,415.67 1737.7,463.54
  rectangle net IN+_U_CurrentSensor1: 1455,415 1523.52,462.87
  rectangle net IN+_U_CurrentSensor1: 1230.98,415 1305,444.83
  rectangle net IN+_U_CurrentSensor1: 1019.5,415 1093,442.24
  rectangle net IN+_U_CurrentSensor1: 793.1,415 868,440.28
  rectangle net IN+_U_CurrentSensor1: 575,415 660.96,453.05
  rectangle net IN+_U_CurrentSensor1: 360,413 435.55,452.64
  rectangle net FET_A: 1163.19,1977.6 1280,2120
  rectangle net FET_A: 1366.6,1760.16 1779.25,1983.5
  rectangle net SENSE: 2720.16,1680 2930,1830.04
  rectangle net SW1: 2517.15,1855 2720,2000
  rectangle net SW2: 2696.38,1365 2945,1670
  rectangle net VOUTSNS: 2732.8,1035 2835,1280
  rectangle net GND: 2860,2335 2930,2519.69
  rectangle net FET_A: 2432.05,1495 2585,1566.57
  rectangle net FET_A: 2495,2080 2625,2170
  rectangle net IN+_U_CurrentSensor1: 1473.98,1187.72 1595,1265
  rectangle net DRVCC: 2640,2288.15 2730,2354.78
  rectangle net FET_A: 825,2070 1225,2120
  rectangle net FET_A: 750,2100 847.65,2150.31
  rectangle net FET_A: 1163.19,1871 1440,1983.66
  rectangle net FET_A: 1163.19,1910 1270,1920
  rectangle net FET_A: 750,2150.31 847.65,2250
  rectangle net NetC3_1: 1637.76,2375 1735,2571.77
  rectangle net NetC3_1: 1479.69,2565 1735,2675
  rectangle net BATTPOS: 1535,2690 2075,2920
  rectangle net VBAT: 1915,2385 2070,2675
  rectangle net VBAT: 1745,2385 2065,2535
  region: 1717.32,2570
  region: 1940,2430
SIG_GND:
  pour cut-out: 2945,2170

## Silkscreen, mask and mechanical layers (free items; w line width, h text height)
Mechanical 1:
  the board outline again, w10
Mechanical 13:
  lines w10: 50,250 ccw(c250,250) 250,50 2750,50 ccw(c2737.5,262.5) 2950,275 2950,2750 ccw(c2750,2750) 2750,2950 242,2952 ccw(c247,2755) 50,2750 50,250
  text "Q1 output of pre-regulation: 8A" at 3200,2873.03 h30

## Text inside footprints (layer, text, board x,y; h text height)
C7: Mechanical 7 "0.26in/6.604mm" at 2537.5,1660 h25 r180; Mechanical 7 "0.102in/2.591mm" at 2638.25,1560 h25 r180; Mechanical 7 "0.26in/6.604mm" at 2875,1297.5 h25 r180; Mechanical 7 "0.291in/7.391mm" at 2543.75,1035 h25 r180; Mechanical 7 "0.032in/0.813mm" at 2164.5,1297.5 h25 r180; Mechanical 7 "Alternate 2 Padstyle: OX90Y60D30P" at 2862.5,1928 h50 r180; Mechanical 7 "Alternate 1 Padstyle: OX60Y90D30P" at 2862.5,1828 h50 r180; Mechanical 7 "Default Padstyle: RX118Y64D0T" at 2812.5,1728 h50 r180
CFF1: Mechanical 7 "0.26in/6.604mm" at 2537.5,1375 h25 r180; Mechanical 7 "0.102in/2.591mm" at 2638.25,1275 h25 r180; Mechanical 7 "0.26in/6.604mm" at 2875,1012.5 h25 r180; Mechanical 7 "0.291in/7.391mm" at 2543.75,750 h25 r180; Mechanical 7 "0.032in/0.813mm" at 2164.5,1012.5 h25 r180; Mechanical 7 "Alternate 2 Padstyle: OX90Y60D30P" at 2862.5,1643 h50 r180; Mechanical 7 "Alternate 1 Padstyle: OX60Y90D30P" at 2862.5,1543 h50 r180; Mechanical 7 "Default Padstyle: RX118Y64D0T" at 2812.5,1443 h50 r180
D4: Top Overlay "1" at 680.16,2315.16 h59.06; Top Overlay "3" at 870.32,2315.16 h59.06
R35: Top Overlay "*" at 2674,2324.4 h50; Mechanical 7 "0.024in/0.61mm" at 2615,2093 h25; Mechanical 7 "0.037in/0.95mm" at 2401.5,2276.2 h25; Mechanical 7 "0.114in/2.896mm" at 2903.5,2257.5 h25; Mechanical 7 "0.119in/3.023mm" at 2656.25,2497 h25; Mechanical 7 "0.067in/1.702mm" at 2656.25,2422 h25; Mechanical 7 "Alt 2 Padstyle: OX90Y60D30P" at 2412.5,1713 h50; Mechanical 7 "Alt 1 Padstyle: OX60Y90D30P" at 2412.5,1773 h50; Mechanical 7 "Pin One Padstyle: RX40Y22D0T" at 2400,1953 h50; Mechanical 7 "Default Padstyle: RX40Y22D0T" at 2400,2013 h50; Mechanical 13 "*" at 2719,2274 h50
U2: Top Overlay "*" at 1886.83,1101.5 h50 r90; Mechanical 7 "0.03in/0.762mm" at 2381,1036.5 h25 r90; Mechanical 7 "0.02in/0.5mm" at 1915.18,854 h25 r90; Mechanical 7 "0.382in/9.703mm" at 2082.5,1441.5 h25 r90; Mechanical 7 "0.252in/6.401mm" at 1709,1141.25 h25 r90; Mechanical 7 "0.173in/4.394mm" at 1784,1141.25 h25 r90; Mechanical 7 "Alt 2 Padstyle: OX90Y60D30P" at 2761,897.5 h50 r90; Mechanical 7 "Alt 1 Padstyle: OX60Y90D30P" at 2701,897.5 h50 r90; Mechanical 7 "Heat Tab Padstyle: RX108Y187D0T" at 2581,847.5 h50 r90; Mechanical 13 "*" at 1932,1151 h50 r90